# EAGLE board saturn_controller_demux_v0.4 (EAGLE 7.5.0)
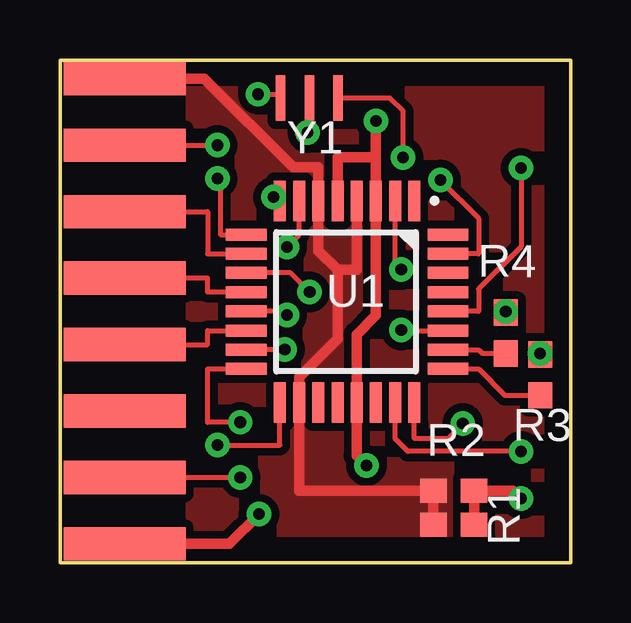
[diagram p0: board, top side]
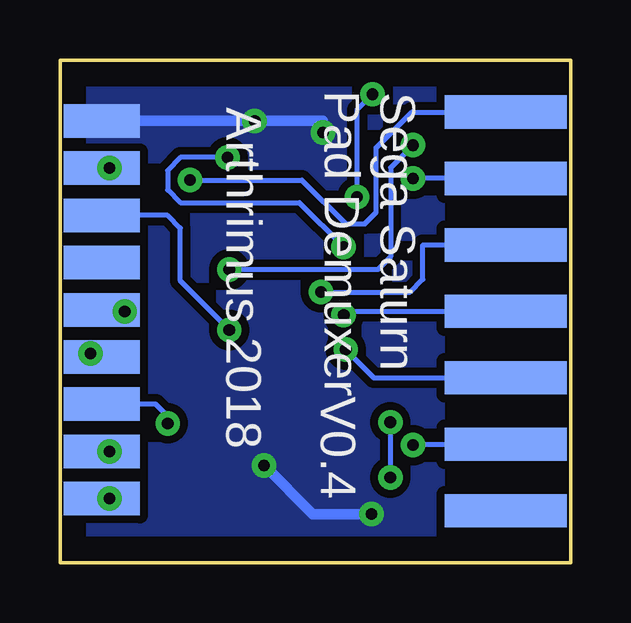
[diagram p1: board, bottom side, seen from below]

Size 21.27 x 20.95 mm. Coordinates in mm from the lower left corner, seen from the top.
Outline: 0,20.95 0,0 21.27,0 21.27,20.95 0,20.95
Copper layers (1*16): Top 0.035mm / dielectric 1.5mm / Bottom 0.035mm
Design rules "default *": minimum track width 10mil, minimum drill 0.61mm, track to track 8mil, track to pad 8mil, pad to pad 8mil, via to via 8mil, smd to smd 8mil, copper to edge 40mil, drill to drill 8mil, minimum pad ring 0mil, minimum via ring 8mil, stop-mask expansion 4mil, vias tented up to drill 19mil, thermal gap 10mil
Net classes: 0 Default: width 0.203 mm, clearance 0.33 mm, clearance 0.33 mm to class 1; 1 Power: width 0.432 mm, clearance 0.33 mm, clearance 0.33 mm to class 0

## Footprints (pad centres in the part's own frame; a part is rotated, then mirrored left to right if it is on the bottom)
Rectangle = smd 5.08 x 1.384: 1 5.558,18.006; 2 5.556,15.236; 3 5.556,12.468; 4 5.556,9.699; 5 5.556,6.931; 6 5.556,4.162; 7 5.556,1.393; 8 5.556,-1.375 | smd 5.08 x 1.384 bottom: 9 5.56,16.619; 10 5.56,13.851; 11 5.56,11.082; 12 5.56,8.314; 13 5.56,5.545; 14 5.56,2.776; 15 5.56,0.008
RES_0603 = smd 1.1 x 1: 1 -0.85,0; 2 0.85,0
QFP-32/9x9x0.8 = smd 1.7 x 0.5: 1 -4.2,2.8; 2 -4.2,2; 3 -4.2,1.2; 4 -4.2,0.4; 5 -4.2,-0.4; 6 -4.2,-1.2; 7 -4.2,-2; 8 -4.2,-2.8; 17 4.2,-2.8; 18 4.2,-2; 19 4.2,-1.2; 20 4.2,-0.4; 21 4.2,0.4; 22 4.2,1.2; 23 4.2,2; 24 4.2,2.8 | smd 0.5 x 1.7: 9 -2.8,-4.2; 10 -2,-4.2; 11 -1.2,-4.2; 12 -0.4,-4.2; 13 0.4,-4.2; 14 1.2,-4.2; 15 2,-4.2; 16 2.8,-4.2; 25 2.8,4.2; 26 2,4.2; 27 1.2,4.2; 28 0.4,4.2; 29 -0.4,4.2; 30 -1.2,4.2; 31 -2,4.2; 32 -2.8,4.2
Saturn_Connector = smd 3.175 x 1.397 bottom: 1 11.43,-1.132; 2 11.43,0.835; 3 11.43,2.802; 4 11.43,4.77; 5 11.43,6.737; 6 11.43,8.704; 7 11.43,10.671; 8 11.43,12.638; 9 11.43,14.605
Murata_CTSNE = smd 0.4 x 1.9: 1 -1.2,0; 2 0,0; 3 1.2,0

## Placement (x,y rotation side)
J1  DB15 SMD PADS  [Rectangle]  -2.86,2.17 0 top
R1  RES_0603  [RES_0603]  16.41,1.59 0 top
R2  RES_0603  [RES_0603]  16.41,3.02 0 top
R3  1K  [RES_0603]  20,7.84 90 top
R4  1K  [RES_0603]  18.57,9.58 90 top
U1  ATMEGA328_TQFP32  [QFP-32/9x9x0.8]  11.96,10.88 270 top
U2  SATURN CONNECTOR  [Saturn_Connector]  8.1,3.81 0 top
Y1  MURATA CTSNE  [Murata_CTSNE]  10.39,19.37 180 top

## Library data of the parts
J1 R1-R4 U2 Y1 = common
U1 = common; DATASHEET: http://datasheets.diptrace.com/atmel/atmega48a.pdf; MANUFACTURER: Atmel

## Nets
Net_0: U1.7 Y1.1
Net_1: U1.8 Y1.3
Net_2 [Power]: J1.8 U1.3 U1.5 U1.21 U2.9 Y1.2
Net_3 [Power]: J1.1 R1.1 R2.1 U1.4 U1.6 U1.18
Net_4: J1.12 U1.13
Net_5: J1.10 U1.9
Net_6: J1.14 U1.17
Net_7: J1.7 U1.16
Net_8: J1.13 U1.15
Net_9: J1.5 U1.14
Net_10: J1.4 U1.12
Net_11: J1.3 U1.10
Net_12: J1.11 U1.11
Net_13: J1.2 U1.2
Net_14: J1.9 U1.31
Net_15 [Power]: R1.2 R2.2 U2.1
Net_16: U1.23 U2.2
Net_17: U1.24 U2.3
Net_18: R3.1 U1.25
Net_19: R4.1 U1.26
Net_20: U1.27 U2.7
Net_21: U1.28 U2.8
Net_22: R3.2 U2.4
Net_23: R4.2 U2.5

## Tracks (layer width: path | path; a pad name or v marks a point on that pad's centre or on a via)
Net_0  (via drill 0.49 pad 1.02)
  Top 0.203: v9.45,13.16 9.96,13.68 U1.7 | v14.29,16.89 14.29,18.82 13.75,19.37 Y1.1
  Bottom 0.203: v14.29,16.89 16.26,16.89 16.79,16.36 16.79,15.55 16.26,15.01 11.3,15.01 v9.45,13.16
Net_1  (via drill 0.49 pad 1.02)
  Top 0.203: v8.25,19.53 9.03,19.53 Y1.3 | v8.89,15.24 9,15.24 U1.8
  Bottom 0.203: v8.89,15.24 8.89,18.89 v8.25,19.53
Net_2  (via drill 0.49 pad 1.02)
  Top 0.203: Y1.2 10.32,19.37 v10.32,17.94
  Top 0.432: U1.5 11.56,16.89 12.95,16.89 | 8.3,1.91 v8.3,2.03 7.06,0.79 J1.8 | v12.77,4.06 12.36,4.47 U1.21 12.36,9.51 13.16,10.31 U1.3 v13.16,18.41
  Bottom 0.432: U2.9 v13.16,18.41 | v13.16,18.41 | v13.16,18.41 10.32,18.41 v10.32,17.94 | v12.77,4.06 10.74,2.03 v8.3,2.03 | 12.95,18.2 v13.16,18.41
  pour Bottom (isolate 0.33): 5.56,20 5.56,0.95 20.48,0.95 20.48,20
Net_3
  Top 0.432: U1.4 12.36,12.21 11.56,12.21 | 11.56,12.21 10.76,13.01 U1.6 10.76,16.48 9.72,16.48 6.02,20.18 J1.1 | R1.1 R2.1 9.96,3.02 U1.18 9.96,7.74 11.56,9.34 11.56,12.21
  pour Top (isolate 0.33): 5.56,20.48 20.8,20.48 20.8,0.48 5.56,0.48 5.56,11.27
Net_4  (via drill 0.49 pad 1.02)
  Top 0.203: v9.45,10.33 9.3,10.48 U1.13
  Bottom 0.203: v9.45,10.33 9.3,10.48 J1.12
Net_5  (via drill 0.49 pad 1.02)
  Top 0.203: v6.56,16.02 6.68,15.9 6.68,13.68 U1.9
  Bottom 0.203: J1.10 v6.56,16.02 | v6.56,16.02
Net_6  (via drill 0.49 pad 1.02)
  Top 0.203: v6.56,4.91 9.16,4.91 U1.17
  Bottom 0.203: v6.56,4.91 6.52,4.95 J1.14
Net_7  (via drill 0.49 pad 1.02)
  Top 0.203: J1.7 v7.51,3.56 | v7.51,3.56 | v7.51,5.86 6.15,5.86 6.15,8.08 U1.16
  Bottom 0.203: v7.51,5.86 v7.51,3.56
Net_8  (via drill 0.49 pad 1.02)
  Top 0.203: v9.37,8.89 9.36,8.88 U1.15
  Bottom 0.203: v9.37,8.89 8.19,7.71 J1.13
Net_9
  Top 0.203: J1.5 6.15,9.1 6.15,9.68 U1.14
Net_10
  Top 0.203: U1.12 6.15,11.28 6.15,11.87 J1.4
Net_11
  Top 0.203: J1.3 6.15,14.64 6.15,12.88 U1.10
Net_12  (via drill 0.49 pad 1.02)
  Top 0.203: v10.4,11.29 9.61,12.08 U1.11
  Bottom 0.203: v10.4,11.29 6.68,11.29 6.15,11.82 6.15,13.25 J1.11
Net_13  (via drill 0.49 pad 1.02)
  Top 0.203: J1.2 v6.56,17.41 | v6.56,17.41 | v14.22,12.22 13.96,12.48 U1.2
  Bottom 0.203: v6.56,17.41 7.5,16.47 7.5,12.76 8.03,12.22 v14.22,12.22
Net_14  (via drill 0.49 pad 1.02)
  Top 0.203: v15.85,15.95 17.45,14.36 17.45,12.88 U1.31
  Bottom 0.203: v15.85,15.95 11.19,15.95 9.37,14.13 8.57,14.13 8.1,14.61 8.1,17.3 6.61,18.79 J1.9
Net_15  (via drill 0.49 pad 1.02)
  Top 0.432: R1.2 R2.2 18.87,3.02 v19.21,2.68
  Bottom 0.203: U2.1 | U2.1 v19.21,2.68
Net_16  (via drill 0.49 pad 1.02)
  Top 0.203: v19.21,4.64 14.5,4.64 13.96,5.18 U1.23
  Bottom 0.203: U2.2 | U2.2 v19.21,4.64
Net_17  (via drill 0.49 pad 1.02)
  Top 0.203: v16.78,5.81 16.15,5.18 14.76,5.18 U1.24
  Bottom 0.203: v16.78,5.81 16.78,6.1 17.29,6.61 U2.3
Net_18
  Top 0.203: U1.25 17.45,8.08 18.54,6.98 R3.1
Net_19
  Top 0.203: U1.26 17.45,8.88 17.59,8.73 R4.1
Net_20  (via drill 0.49 pad 1.02)
  Top 0.203: v14.22,9.71 14.25,9.68 U1.27
  Bottom 0.203: v14.22,9.71 16.26,11.75 16.26,13.95 16.79,14.48 U2.7
Net_21  (via drill 0.49 pad 1.02)
  Top 0.203: v19.21,16.45 19.21,13.18 17.45,11.42 17.45,10.48 U1.28
  Bottom 0.203: U2.8 | U2.8 v19.21,16.45
Net_22  (via drill 0.49 pad 1.02)
  Top 0.203: R3.2 v20,8.73
  Bottom 0.203: v20,8.73 19.68,8.73 U2.4
Net_23  (via drill 0.49 pad 1.02)
  Top 0.203: v18.57,10.48 R4.2
  Bottom 0.203: v18.57,10.48 19.46,10.48 U2.5

## Text on the board
bPlace: Sega Saturn | Pad Demuxer | Arthrimus 2018 | V0.4